# Altium PCB FFC_ToHDR__Pcb.PcbDoc
Units mil, origin at the board's own origin, x right, y up, seen from the top; angles counter-clockwise.
Board outline 551.18 x 511.81 mil, 2 copper layers (Top Layer, Bottom Layer); 4 components, 9 nets, 30 pads, 28 vias.
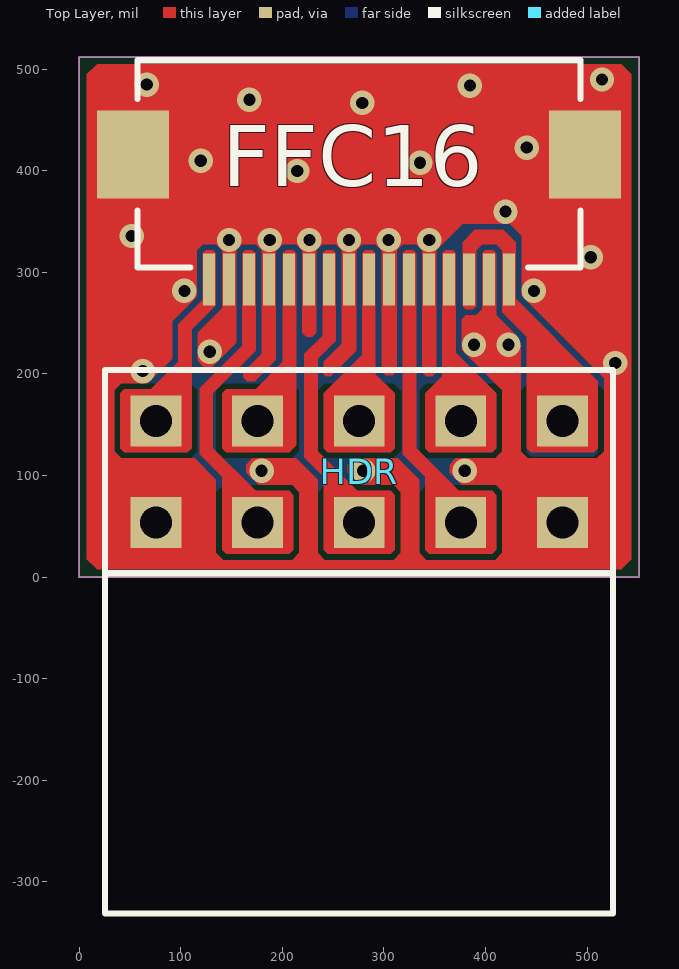
[diagram p0: Top Layer view]
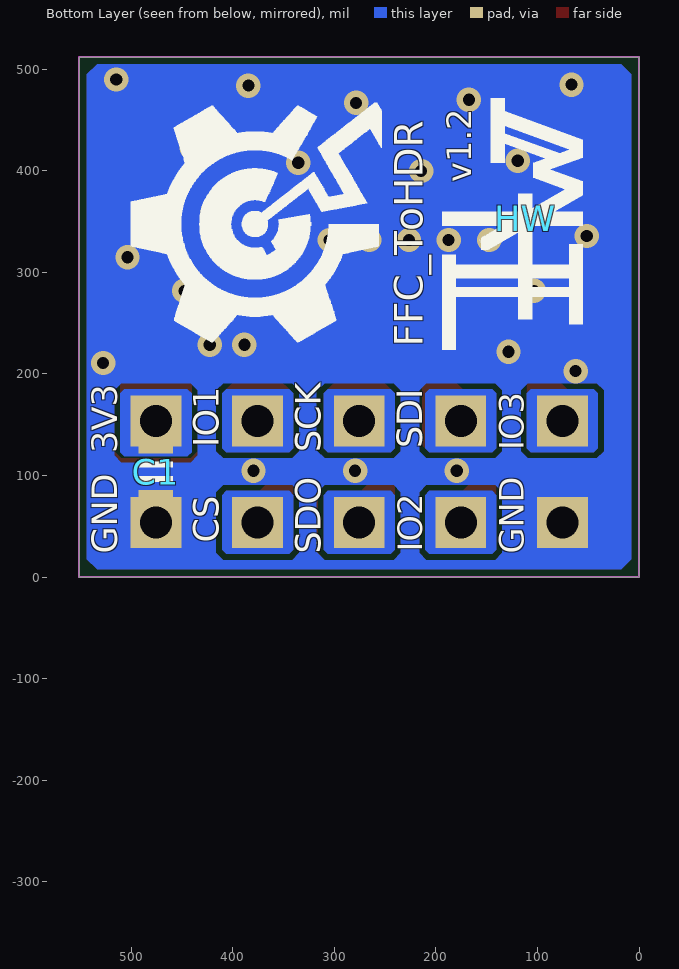
[diagram p1: Bottom Layer view, seen from below]

## Layer stack, top to bottom
Top Solder: solder mask 0.4, Solder Resist, Dk 3.5
Top Layer: signal copper 1.4
Dielectric1: dielectric 12.6, FR-4, Dk 4.8
Bottom Layer: signal copper 1.4
Bottom Solder: solder mask 0.4, Solder Resist, Dk 3.5

## Board outline
0,0 551.18,0 551.18,511.81 0,511.81

## Design rules (kind name [scope] priority, off if disabled: settings)
Clearance ClearancePolygon [InPolygon] p1: gap=8
Clearance [All] p2: gap=6
ComponentClearance [All] p1: gap=0 collisioncheckmode=3 verticalgap=0 showdistances=FALSE
HoleSize [All] p1: absolutevalues=TRUE maxlimit=150 minlimit=1 maxpercent=80.000 minpercent=20.000
HoleToHoleClearance [All] p1: gap=6 allowstackedmicrovias=TRUE
MinimumSolderMaskSliver [All] p1: minsoldermaskwidth=0
PlaneConnect [All] p1: planeconnectstyle=Direct reliefexpansion=20 reliefentries=4 reliefconductorwidth=10 reliefairgap=10
PolygonConnect [All] p1: connectstyle=Direct reliefconductorwidth=10 reliefentries=4 polygonreliefangle="90 Angle" airgapwidth=10
RoutingVias [All] p1: holewidth=12 width=24 viastyle="Through Hole" minholewidth=12 minwidth=20 maxholewidth=24 maxwidth=50
SilkToSilkClearance [All] p1: silktosilkclearance=0
SilkToSolderMaskClearance [IsPad] p1: minsilkscreentomaskgap=2 clearancetoexposedcopper=TRUE
SolderMaskExpansion [All] p1: expansion=0
Width [All] p1: maxlimit=30 minlimit=6 preferedwidth=10
22 further rules are at their usual default settings.

## Components (designator, comment, footprint, x,y, rotation, side; value= is the part's Value field where it differs from the comment)
C1 "Cap_0603" CAP_0603 475.59,103.81 r90 bottom locked
FFC16 "FFC_0.5_16" FFC_0.5_16 275.59,356.81 r180 top locked
HDR "HDR2X5_90_2.54" HDR2X5_90_2.54 475.59,153.81 r180 top locked
HW "HW" Logo_HW_v2.0 112.09,352.81 r90 bottom

## Footprints (in the part's own frame and the unit in brackets; to place one, negate y for a bottom-side part, rotate by r counter-clockwise, add the part's x,y. Pads: shape width x height; smd on the part's side, far side on the other; paste and mask are expansions set on the pad)
CAP_0603 [mil] "Chip Capacitor, Body 1.6x0.8mm, 0603, IPC Medium Density"
  rect 28x34 smd mask+1: 1(-32,0) 2(32,0)
  Top Layer pour cut-out: -18,17 18,17 18,-17 -18,-17
  silkscreen extent -10,-17 10,17, body extent -31,-16 31,16, height 36
FFC_0.5_16 [mm] "Connector; FH12 Series; 16 Position; 0.5mm Spaced Bottom Contact"
  rect 1.8x2.2 smd: 0(-5.65,-1.498) 0(5.65,-1.498)
  rect 0.3x1.3 smd: 1(-3.75,1.625) 2(-3.25,1.625) 3(-2.75,1.625) 4(-2.25,1.625) 5(-1.75,1.625) 6(-1.25,1.625) 7(-0.75,1.625) 8(-0.25,1.625) 9(0.25,1.625) 10(0.75,1.625) 11(1.25,1.625) 12(1.75,1.625) 13(2.25,1.625) 14(2.75,1.625) 15(3.25,1.625) 16(3.75,1.625)
  silkscreen extent -5.54,-3.86 5.54,1.32, body extent -6.75,-3.94 6.75,1.4, height 2.08
HDR2X5_90_2.54 [mm] "Connector; Header; 2x2 Position"
  rect 1.27x1.27 hole 0.8: 1(0,0) 2(0,2.54) 3(2.54,0) 4(2.54,2.54) 5(5.08,0) 6(5.08,2.54) 7(7.62,0) 8(7.62,2.54) 9(10.16,0) 10(10.16,2.54)
  silkscreen extent -1.27,-1.27 11.43,12.32, body extent -1.27,-0.32 11.43,12.57, height 5.04
Logo_HW_v2.0 [mil]
  silkscreen extent -129,-57 119,82

## Part data
C1: "Capacitor"
FFC16: "FFC"
HDR: "Header"
HW: "Logo"

## Via types
v1: diameter 24, hole 12, Top Layer to Bottom Layer, 28 vias

## Nets (pads, with @x,y where several pads share a name; then routed paths per layer and width w, separated by ;. In a path a pad name is that pad's centre, name@x,y a point inside that pad or via, vN(x,y) a via of type N, cw(c..) or ccw(c..) an arc to the next point about the centre after c; other vN are vias at no path point)
3V3: C1.2 FFC16.1 FFC16.3 HDR.1 | length 273.3
  Top Layer w12: FFC16.3 383.86,325.08 393.59,334.81 414.59,334.81 423.23,326.17 423.23,270.17 475.59,217.81 HDR.1
CS: FFC16.6 HDR.4 | length 260.1
  Top Layer w12: FFC16.6 324.8,123.6 375.59,72.81 HDR.4
GND: C1.1 FFC16.0 FFC16.2 FFC16.5 FFC16.7 FFC16.9 FFC16.11 FFC16.13 FFC16.15 HDR.2 HDR.10
  other v1: 179.59,104.81 279.59,104.81 379.59,104.81 62.59,202.81 527.59,210.81 128.59,221.81 388.59,228.81 422.59,228.81 103.59,281.81 447.59,281.81 503.59,314.81 147.59,331.81 187.59,331.81 226.59,331.81 265.59,331.81 304.59,331.81 344.59,331.81 51.59,335.81 419.59,359.81 214.59,399.81 335.59,407.81 119.59,409.81 440.59,422.81 278.59,466.81 167.59,469.81 384.59,483.81 66.59,484.81 514.59,489.81
IO1: FFC16.4 HDR.3
IO2: FFC16.14 HDR.8
IO3: FFC16.16 HDR.9
SCK: FFC16.8 HDR.5
SDI: FFC16.12 HDR.7
SDO: FFC16.10 HDR.6

## Keep-outs
Keep-Out Layer:
  the board outline again, w2

## Other copper
Top Layer:
  region net 3V3: 416.59,321.81 410.59,327.81 396.59,327.81 390.59,321.81 390.59,266.81 387.59,263.81 380.59,263.81 377.59,266.81 377.59,329.81 389.59,341.81 417.59,341.81 429.59,329.81 429.59,273.81 510.59,192.81 510.59,126.81 506.59,122.81 444.59,122.81 440.59,126.81 440.59,236.81 416.59,260.81
  region net CS: 318.59,318.81 321.59,321.81 328.59,321.81 331.59,318.81 331.59,126.81 373.59,84.81 406.59,84.81 410.59,80.81 410.59,26.81 406.59,22.81 344.59,22.81 340.59,26.81 340.59,98.81 318.59,120.81
  region net IO1: 340.59,180.81 357.59,197.81 357.59,318.81 360.59,321.81 367.59,321.81 370.59,318.81 370.59,220.81 410.59,180.81 410.59,126.81 406.59,122.81 344.59,122.81 340.59,126.81
  region net SCK: 240.59,180.81 278.59,218.81 278.59,318.81 281.59,321.81 288.59,321.81 291.59,318.81 291.59,199.81 310.59,180.81 310.59,126.81 306.59,122.81 244.59,122.81 240.59,126.81
  region net SDI: 140.59,180.81 144.59,184.81 173.59,184.81 200.59,211.81 200.59,318.81 203.59,321.81 210.59,321.81 213.59,318.81 213.59,129.81 206.59,122.81 144.59,122.81 140.59,126.81
  region net SDO: 221.59,219.81 239.59,237.81 239.59,318.81 242.59,321.81 249.59,321.81 252.59,318.81 252.59,232.81 234.59,214.81 234.59,123.81 273.59,84.81 306.59,84.81 310.59,80.81 310.59,26.81 306.59,22.81 244.59,22.81 240.59,26.81 240.59,98.81 221.59,117.81
  region net IO2: 118.59,185.81 160.59,227.81 160.59,318.81 163.59,321.81 170.59,321.81 173.59,318.81 173.59,222.81 131.59,180.81 131.59,126.81 173.59,84.81 206.59,84.81 210.59,80.81 210.59,26.81 206.59,22.81 144.59,22.81 140.59,26.81 140.59,98.81 118.59,120.81
  region net GND: 396.59,318.81 399.59,321.81 407.59,321.81 410.59,318.81 410.59,257.81 431.09,237.31 422.59,228.81 434.59,228.81 434.59,123.81 441.59,116.81 509.59,116.81 516.59,123.81 516.59,195.81 435.59,276.81 435.59,335.81 423.59,347.81 377.59,347.81 351.59,321.81 351.59,201.81 347.59,197.81 341.59,197.81 337.59,201.81 337.59,321.81 331.59,327.81 318.59,327.81 312.59,321.81 312.59,202.81 308.59,198.81 301.59,198.81 297.59,202.81 297.59,321.81 291.59,327.81 278.59,327.81 272.59,321.81 272.59,222.81 247.59,197.81 242.59,197.81 240.59,199.81 240.59,211.81 258.59,229.81 258.59,321.81 252.59,327.81 239.59,327.81 233.59,321.81 233.59,240.81 229.59,236.81 223.59,236.81 219.59,240.81 219.59,321.81 213.59,327.81 200.59,327.81 193.59,320.81 193.59,213.81 172.59,192.81 165.59,192.81 161.59,196.81 161.59,201.81 179.59,219.81 179.59,321.81 173.59,327.81 160.59,327.81 154.59,321.81 154.59,230.81 130.59,206.81 122.59,206.81 116.59,212.81 116.59,240.81 140.59,264.81 140.59,321.81 134.59,327.81 121.59,327.81 115.59,321.81 115.59,292.81 7.59,292.81 7.59,494.81 17.59,504.81 533.59,504.81 543.59,494.81 543.59,17.81 533.59,7.81 17.59,7.81 7.59,17.81 7.59,292.81 115.59,292.81 115.59,275.81 91.59,251.81 91.59,214.81 67.59,190.81 41.59,190.81 34.59,183.81 34.59,123.81 41.59,116.81 113.59,116.81 134.59,95.81 134.59,23.81 141.59,16.81 209.59,16.81 216.59,23.81 216.59,83.81 209.59,90.81 176.59,90.81 164.59,102.81 164.59,110.81 170.59,116.81 213.59,116.81 234.59,95.81 234.59,23.81 241.59,16.81 309.59,16.81 316.59,23.81 316.59,83.81 309.59,90.81 276.59,90.81 264.59,102.81 264.59,110.81 270.59,116.81 313.59,116.81 334.59,95.81 334.59,23.81 341.59,16.81 409.59,16.81 416.59,23.81 416.59,84.81 410.59,90.81 376.59,90.81 364.59,102.81 364.59,110.81 370.59,116.81 409.59,116.81 416.59,123.81 416.59,183.81 376.59,223.81 376.59,253.81 380.59,257.81 390.59,257.81 396.59,263.81
  region net IO3: 40.59,180.81 44.59,184.81 70.59,184.81 97.59,211.81 97.59,248.81 121.59,272.81 121.59,318.81 124.59,321.81 131.59,321.81 134.59,318.81 134.59,267.81 110.59,243.81 110.59,126.81 106.59,122.81 44.59,122.81 40.59,126.81
Bottom Layer:
  region net GND: 7.59,494.81 17.59,504.81 533.59,504.81 543.59,494.81 543.59,17.81 533.59,7.81 516.59,7.81 516.59,183.81 509.59,190.81 41.59,190.81 34.59,183.81 34.59,123.81 41.59,116.81 109.59,116.81 116.59,123.81 116.59,183.81 109.59,190.81 141.59,190.81 134.59,183.81 134.59,123.81 141.59,116.81 209.59,116.81 216.59,123.81 216.59,83.81 209.59,90.81 141.59,90.81 134.59,83.81 134.59,23.81 141.59,16.81 209.59,16.81 216.59,23.81 216.59,183.81 209.59,190.81 241.59,190.81 234.59,183.81 234.59,123.81 241.59,116.81 309.59,116.81 317.59,124.81 317.59,82.81 309.59,90.81 241.59,90.81 234.59,83.81 234.59,23.81 241.59,16.81 309.59,16.81 317.59,24.81 317.59,182.81 309.59,190.81 341.59,190.81 334.59,183.81 334.59,123.81 341.59,116.81 409.59,116.81 416.59,123.81 416.59,83.81 409.59,90.81 341.59,90.81 334.59,83.81 334.59,23.81 341.59,16.81 409.59,16.81 416.59,23.81 416.59,183.81 409.59,190.81 441.59,190.81 434.59,183.81 434.59,119.81 441.59,112.81 509.59,112.81 516.59,119.81 516.59,7.81 17.59,7.81 7.59,17.81
  region net IO3: 40.59,180.81 44.59,184.81 106.59,184.81 110.59,180.81 110.59,126.81 106.59,122.81 44.59,122.81 40.59,126.81
  region net SDI: 140.59,180.81 144.59,184.81 206.59,184.81 210.59,180.81 210.59,126.81 206.59,122.81 144.59,122.81 140.59,126.81
  region net SCK: 240.59,180.81 244.59,184.81 306.59,184.81 310.59,180.81 310.59,126.81 306.59,122.81 244.59,122.81 240.59,126.81
  region net IO2: 140.59,80.81 144.59,84.81 206.59,84.81 210.59,80.81 210.59,26.81 206.59,22.81 144.59,22.81 140.59,26.81
  region net SDO: 240.59,80.81 244.59,84.81 306.59,84.81 310.59,80.81 310.59,26.81 306.59,22.81 244.59,22.81 240.59,26.81
  region net CS: 340.59,80.81 344.59,84.81 406.59,84.81 410.59,80.81 410.59,26.81 406.59,22.81 344.59,22.81 340.59,26.81
  region net IO1: 340.59,180.81 344.59,184.81 406.59,184.81 410.59,180.81 410.59,126.81 406.59,122.81 344.59,122.81 340.59,126.81
  region net 3V3: 440.59,180.81 444.59,184.81 506.59,184.81 510.59,180.81 510.59,122.81 506.59,118.81 444.59,118.81 440.59,122.81

## Silkscreen, mask and mechanical layers (free items; w line width, h text height)
Bottom Overlay:
  drawing of 3067 lines, arcs and shapes, not listed
  text "v1.2" at 165.09,388.81 h24 r270
  text "FFC_ToHDR" at 213.09,226.81 h27.95 r270
  text "IO1" at 413.59,127.81 h25 r270
  text "SDI" at 213.59,126.81 h25 r270
  text "IO3" at 113.59,124.81 h24 r270
  text "SCK" at 313.59,122.81 h25 r270
  text "3V3" at 513.59,121.81 h25 r270
  text "CS" at 413.59,33.81 h25 r270
  text "IO2" at 213.59,24.81 h24 r270
  text "GND" at 113.59,22.81 h24 r270
  text "SDO" at 313.59,22.81 h25 r270
  text "GND" at 513.59,22.81 h25 r270
Mechanical 1:
  the board outline again, w0

## Dimensions
0,511.81 to 551.18,511.81 on Mechanical 13
551.18,0 to 551.18,511.81 on Mechanical 13